# Altium PCB Boost_PWR_Supply.PcbDoc
Units mil, origin at the board's own origin, x right, y up, seen from the top; angles counter-clockwise.
Board outline 1025 x 1710 mil, 2 copper layers (Top Layer, Bottom Layer); 24 components, 10 nets, 52 pads, 0 vias.
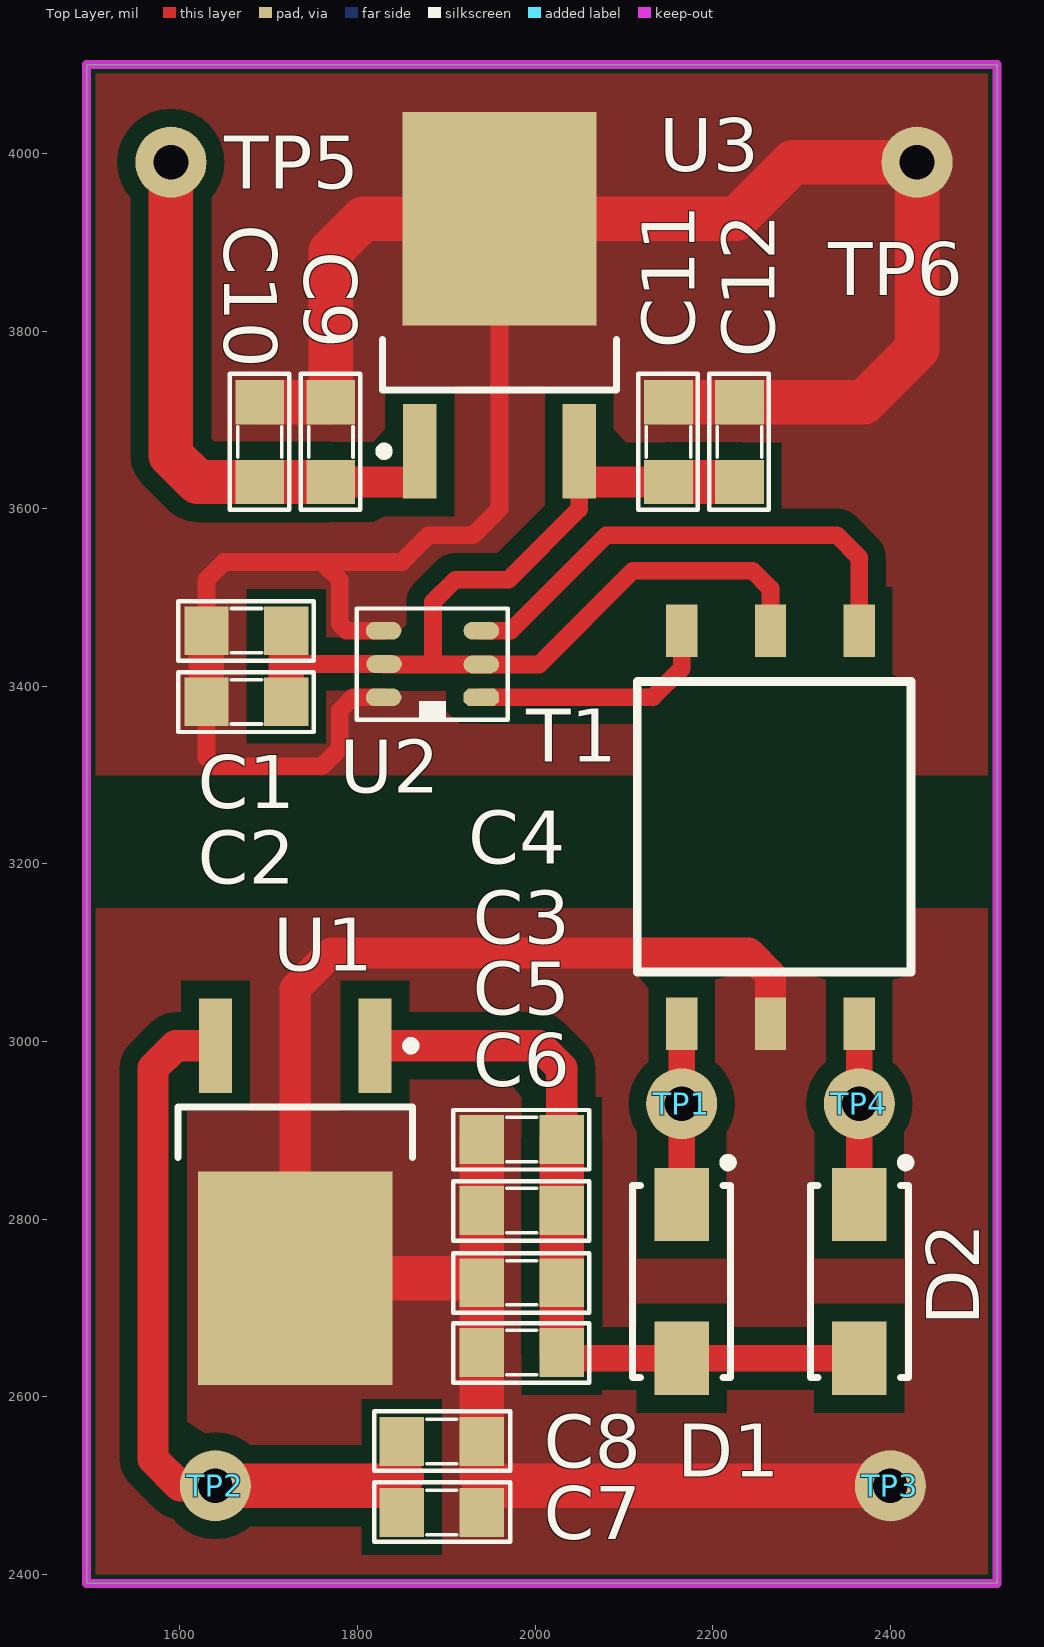
[diagram p0: Top Layer view]
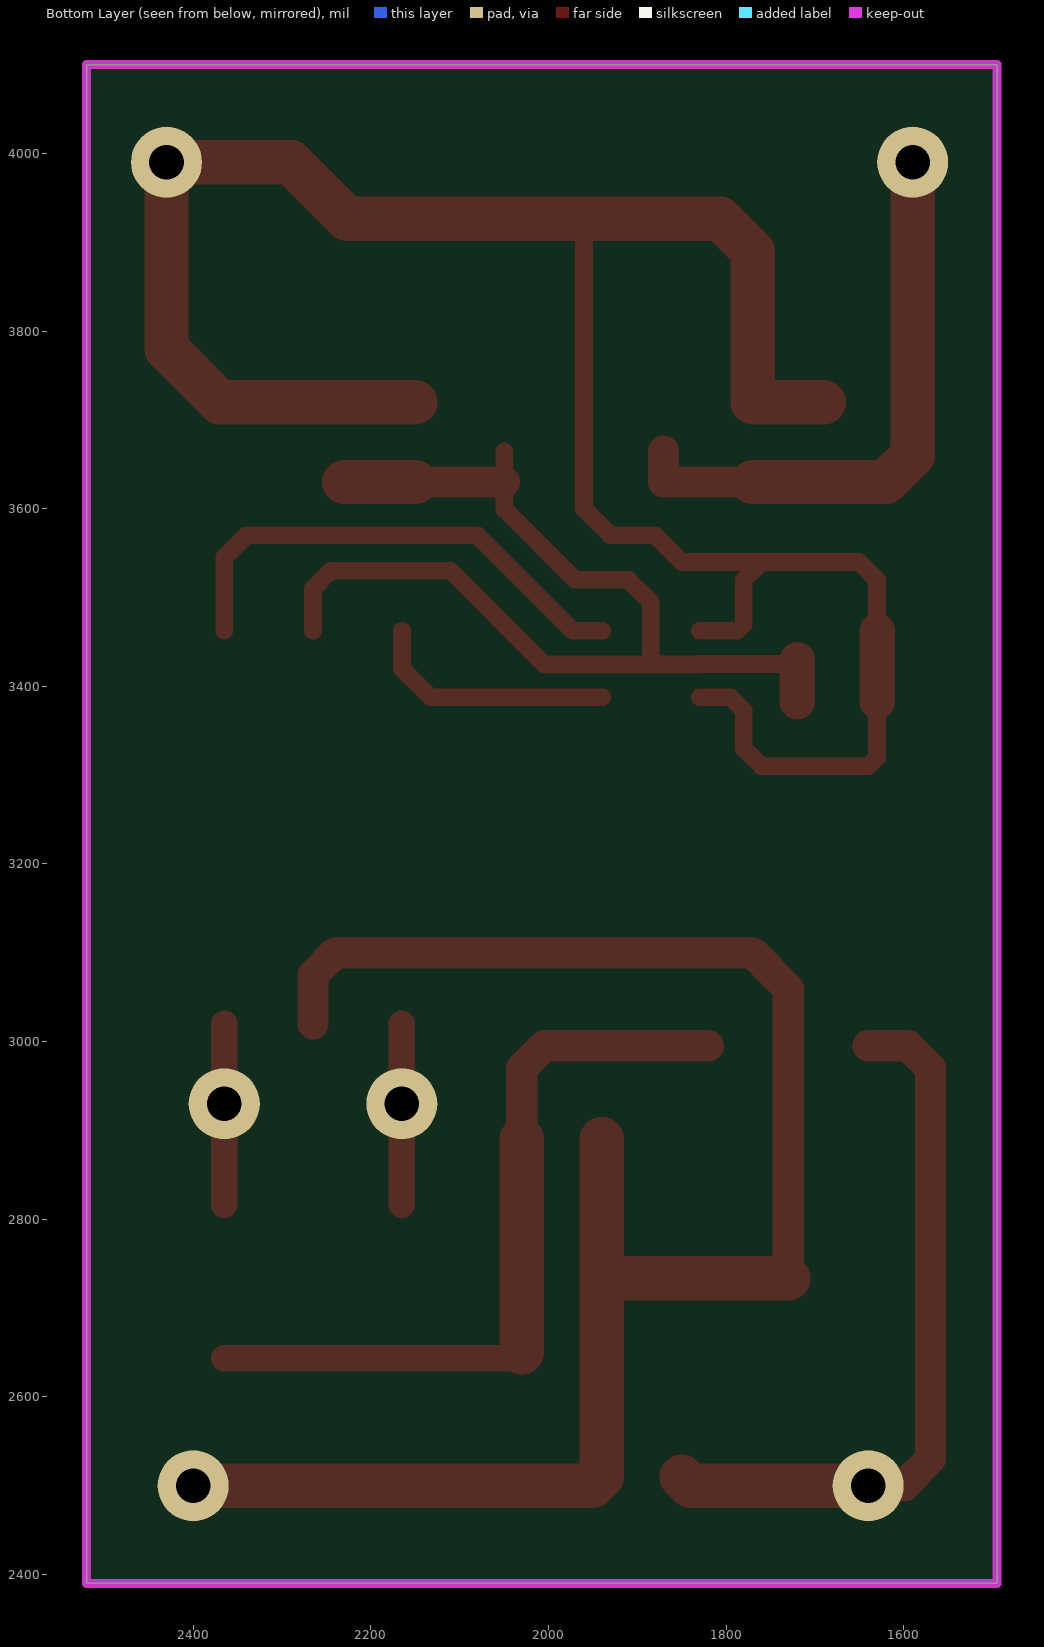
[diagram p1: Bottom Layer view, seen from below]
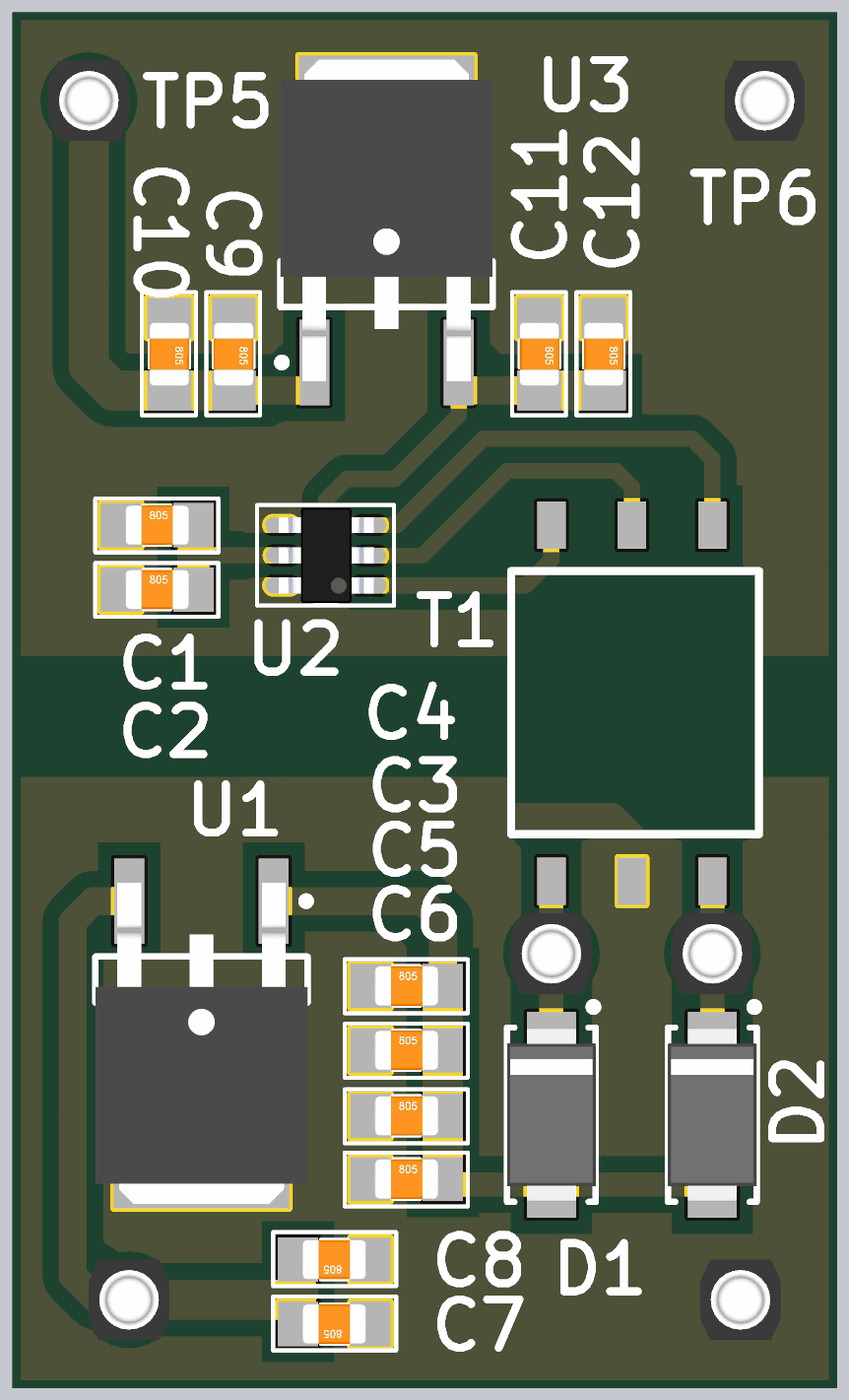
[diagram p2: 3D render of the assembled board from above, using the file's embedded part models]

## Layer stack, top to bottom
Top Solder: solder mask 0.4, Solder Resist, Dk 3.5
Top Layer: signal copper 1.4
Dielectric 1: dielectric 12.6, FR-4, Dk 4.8
Bottom Layer: signal copper 1.4
Bottom Solder: solder mask 0.4, Solder Resist, Dk 3.5

## Board outline
1495,2390 2520,2390 2520,4100 1495,4100

## Design rules (kind name [scope] priority, off if disabled: settings)
BoardOutlineClearance [All] p1: gap=10 ignorepadtopadclearanceinfootprint=FALSE
Clearance [All] p1: gap=10 ignorepadtopadclearanceinfootprint=TRUE
PlaneConnect [All] p1: planeconnectstyle=Direct reliefexpansion=20 reliefentries=4 reliefconductorwidth=10 reliefairgap=10
PolygonConnect [All] p1: connectstyle=Direct reliefconductorwidth=10 reliefentries=4 polygonreliefangle="90 Angle" airgapwidth=10
RoutingVias [All] p1: holewidth=28 width=50 viastyle="Through Hole" minholewidth=28 minwidth=50 maxholewidth=28 maxwidth=50
SolderMaskExpansion [All] p1: expansion=4
Width [All] p1: maxlimit=50 minlimit=20 preferedwidth=30
29 further rules are at their usual default settings.

## Components (designator, comment, footprint, x,y, rotation, side; value= is the part's Value field where it differs from the comment)
C1 "Cap Non-Pol SMD" CAP-SM-0805 1630,3462.6 r0 top value=1uF
C2 "Cap Non-Pol SMD" CAP-SM-0805 1630,3382.6 r0 top value=100nF
C3 "Cap Non-Pol SMD" CAP-SM-0805 1940,2810 r0 top value=10uF
C4 "Cap Non-Pol SMD" CAP-SM-0805 1940,2890 r0 top value=1uF
C5 "Cap Non-Pol SMD" CAP-SM-0805 1940,2728.54 r0 top value=1uF
C6 "Cap Non-Pol SMD" CAP-SM-0805 1940,2650 r0 top value=100nF
C7 "Cap Non-Pol SMD" CAP-SM-0805 1940,2470 r180 top value=1uF
C8 "Cap Non-Pol SMD" CAP-SM-0805 1940,2550 r180 top value=100nF
C9 "Cap Non-Pol SMD" CAP-SM-0805 1770,3720 r270 top value=1uF
C10 "Cap Non-Pol SMD" CAP-SM-0805 1690,3720 r270 top value=100nF
C11 "Cap Non-Pol SMD" CAP-SM-0805 2150,3720 r270 top value=1uF
C12 "Cap Non-Pol SMD" CAP-SM-0805 2230,3720 r270 top value=100nF
D1 "D Schottky" SS34 2165,2730 r270 top
D2 "D Schottky" SS34 2365,2730 r270 top
T1 "WE 1:3 Transformer" 750316818 2365,3462.52 r270 top
TP1 "Test Point" TP_2 2165,2930 r0 top
TP2 "Test Point" TP_2 1640,2500 r0 top
TP3 "Test Point" TP_2 2400,2500 r0 top
TP4 "Test Point" TP_2 2365,2930 r0 top
TP5 "Test Point" TP_2 1590,3990 r0 top
TP6 "Test Point" TP_2 2430,3990 r0 top
U1 "LM7812" DPAK228P1014X239-3N 1730,2830 r270 top
U2 "SN6505BDBVR" SOT23-6 1880,3420 r180 top
U3 "78M05" DPAK228P1014X239-3N 1960,3830 r90 top

## Footprints (in the part's own frame and the unit in brackets; to place one, negate y for a bottom-side part, rotate by r counter-clockwise, add the part's x,y. Pads: shape width x height; smd on the part's side, far side on the other; paste and mask are expansions set on the pad)
750316818 [mm]
  rect 1.5x0.9 smd: 1(0,0) 2(0,-2.54) 3(0,-5.08) 4(11.24,-5.08) 5(11.24,-2.54) 6(11.24,0)
  silkscreen extent 1.45,-6.35 9.75,1.47, body extent 0.88,-6.92 10.35,1.89, height 5.08
CAP-SM-0805 [mil]
  rect 50x55 smd: 1(0,0) 2(90,0)
  silkscreen extent -32,-34 121,33, body extent 6,-25 84,25, height 31
DPAK228P1014X239-3N [mm] "D-PAK, 3-Pads, Body 6.21x6.72mm (max), IPC Medium Density"
  rect 2.7x0.95 smd: 1(-4.2,2.28) 3(-4.2,-2.28)
  rect 6.1x5.55 smd: 2(2.45,0)
  silkscreen extent -4.32,-3.35 -1,3.43, body extent -4.79,-3.35 5.35,3.35, height 2.39
SOT23-6 [mil]
  oct 40x20 smd: 1(-59.41,32.4)
  oval 40x20 smd: 2(-59.41,-4.6) 3(-59.41,-42.6) 4(50.59,-42.6) 5(50,-5) 6(50.59,32.4)
  silkscreen extent -89,-68 81,57, body extent -64,-64 54,54, height 51
SS34 [mm] "DO-214-AC/SMA Molded Diode, Body 5.3x2.6mm, IPC Medium Density"
  rect 2.1x1.55 smd: 1(-2.2,0) 2(2.2,0)
  silkscreen extent -3.52,-1.4 2.75,1.45, body extent -2.75,-1.4 2.75,1.4, height 2.3
TP_2 [mil]
  round 80 hole 39: TP1(0,0)
  body extent -50,-50 50,50, height 179

## Part data
C1 C2 C3 C4 C5 C6 C7 C8 C9 C10 C11 C12: "Capacitor"
D1 D2: "Schottky Diode", Code_JEDEC=DO-214-AA, LatestRevisionDate=17-Jul-2002, LatestRevisionNote="Re-released for DXP Platform.", PackageDescription="DO-214-AA/SMB; 2 C-Bend Leads; Body 5.3 x 3.6 mm, inc. leads (LxW)", PackageReference=SMB, Published=8-Jun-2000, Publisher="Altium Limited"
T1: library part "WE 1:3.5 Transformer", Manufacturer="Wurth Elektronik", Manufacturer P/N=750316818, ComponentLink1Description="Supplier 1 Link", ComponentLink1URL=https://www.mouser.vn/ProductDetail/Wurth-Elektronik/750316818?qs=%2Fha2pyFaduhwWLO%2FwuaxPfkbn2Vm0sf%2F6JG8uX8izSO8%2FxDOwuQ00g%3D%3D, Supplier 1=Mouser, Supplier 1 P/N=710-750316818
U1 U3: library part LM78xx
U2: "IC TRANSFORMER DRIVER SOT23-6", Manufacturer="Texas Instrument", Supplier 1 Part Number=296-47311-2-ND, Manufacturer Part Number=SN6505BDBVR, Supplier 1=Digikey, Supplier 1 Link=https://www.digikey.com/en/products/detail/texas-instruments/SN6505BDBVR/5994596?s=N4IgTCBcDaIM4DsBsBWADCgRgE0wNwCcQBdAXyA

## Nets (pads, with @x,y where several pads share a name; then routed paths per layer and width w, separated by ;. In a path a pad name is that pad's centre, name@x,y a point inside that pad or via, vN(x,y) a via of type N, cw(c..) or ccw(c..) an arc to the next point about the centre after c; other vN are vias at no path point)
+5: C1.2 C2.2 C11.2 C12.2 T1.2 U2.2 U2.5 U3.3 | length 1217.9
  Top Layer w20: 1720,3430 1725,3425 U2.5 1830.4,3424.6 1884.91,3424.6 ; U3.3 2049.76,3630.24 2049.76,3599.76 1970,3520 1910,3520 1884.91,3494.91 1884.91,3424.6 ; T1.2 2265,3510 2245,3530 2110,3530 2004.6,3424.6 U2.2 1884.91,3424.6
  Top Layer w35: U3.3@2049.76,3630.24 2149.76,3630.24 C11.2
  Top Layer w40: C2.2 1720,3430
  Top Layer w50: C11.2 C12.2
+12A: C7.2 C8.2 TP2.TP1 U1.3 | length 817.3
  Top Layer w35: TP2.TP1 1600,2500 1570,2530 1570,2970 1595.35,2995.35 U1.3
  Top Layer w50: TP2.TP1 1840,2500 1850,2510
+17.5: C3.2 C4.2 C5.2 C6.2 D1.2 D2.2 U1.1 | length 878.5
  Top Layer w30: C6.2 2036.61,2643.39 D1.2 D2.2
  Top Layer w35: U1.1 2004.65,2995.35 2030,2970 C4.2
  Top Layer w50: C6.2 C5.2 C3.2 C4.2
GND: C1.1 C2.1 C9.1 C10.1 C11.1 C12.1 TP6.TP1 U2.4 U2.6 U3.2 | length 2747.3
  Top Layer w20: C2.1 1630,3320 1640,3310 1760,3310 1780,3330 1780,3372.6 1795,3387.6 U2.6 ; C1.1 1630,3520 1650,3540 1760,3540 ; U2.4 1787.4,3462.6 1780,3470 1780,3520 1760,3540 ; U3.2 1960,3600 1930,3570 1880,3570 1850,3540 1760,3540
  Top Layer w40: C2.1 C1.1
  Top Layer w50: C10.1 C9.1 1770,3890 1806.46,3926.46 U3.2 2226.46,3926.46 2290,3990 TP6.TP1 2430,3780 2370,3720 C12.1 C11.1
GND_OUT: C3.1 C4.1 C5.1 C6.1 C7.1 C8.1 T1.5 TP3.TP1 U1.2 | length 1999.6
  Top Layer w35: U1.2 1730,3060 1770,3100 2240,3100 2265,3075 T1.5
  Top Layer w50: U1.2 1935,2733.54 C5.1 ; C4.1 C3.1 C5.1 ; TP3.TP1 1950,2500 1940,2510 C8.1 C6.1 C5.1
NetC9_2: C9.2 C10.2 TP5.TP1 U3.1 | length 657.2
  Top Layer w35: C9.2 1870,3630 1870.24,3630.24 U3.1
  Top Layer w50: TP5.TP1 1590,3660 1620,3630 C10.2 C9.2
NetD1_1: D1.1 T1.4 TP1.TP1 | length 203.4
  Top Layer w30: D1.1 TP1.TP1 T1.4
NetD2_1: D2.1 T1.6 TP4.TP1 | length 203.4
  Top Layer w30: D2.1 TP4.TP1 T1.6
NetT1_1: T1.1 U2.3 | length 562.9
  Top Layer w20: U2.3 1972.6,3462.6 2080,3570 2340,3570 2365,3545 T1.1
NetT1_3: T1.3 U2.1 | length 281.5
  Top Layer w20: U2.1 2132.6,3387.6 2165,3420 T1.3

## Polygon pours and split planes (outlines as drawn)
GND_OUT on Top Layer "Top Layer-GND_OUT" (solid, remove dead copper, pour order 0): 1495,3150 2520,3150 2520,2390 1495,2390
GND on Top Layer "Top Layer-GND" (solid, remove dead copper, pour order 2): 1495,4100 2520,4100 2520,3300 1495,3300

## Keep-outs
Keep-Out Layer:
  lines w10: 1495,2390 1495,4100 2520,4100 2520,2390 1835,2390 1495,2390

## Other copper
Top Layer:
  pour cut-out: 2114.17,3405.1 2420.7,3405.1 2420.7,3078.43 2424.13,3075 2114.87,3075 2114.87,3404.17 2114.17,3404.87
  pour cut-out: 2302.72,3412.99 2327.28,3412.99 2327.28,3428.64 2302.72,3428.64
  pour cut-out: 2227.28,3412.99 2202.72,3412.99 2202.72,3427.28 2200,3430 2230,3430 2230,3415.71